# Altium PCB PCB1.PcbDoc
Units mil, origin at the board's own origin, x right, y up, seen from the top; angles counter-clockwise.
Board outline 3735.03 x 3790.03 mil, 2 copper layers (Top Layer, Bottom Layer); 89 components, 44 nets, 182 pads, 380 vias.
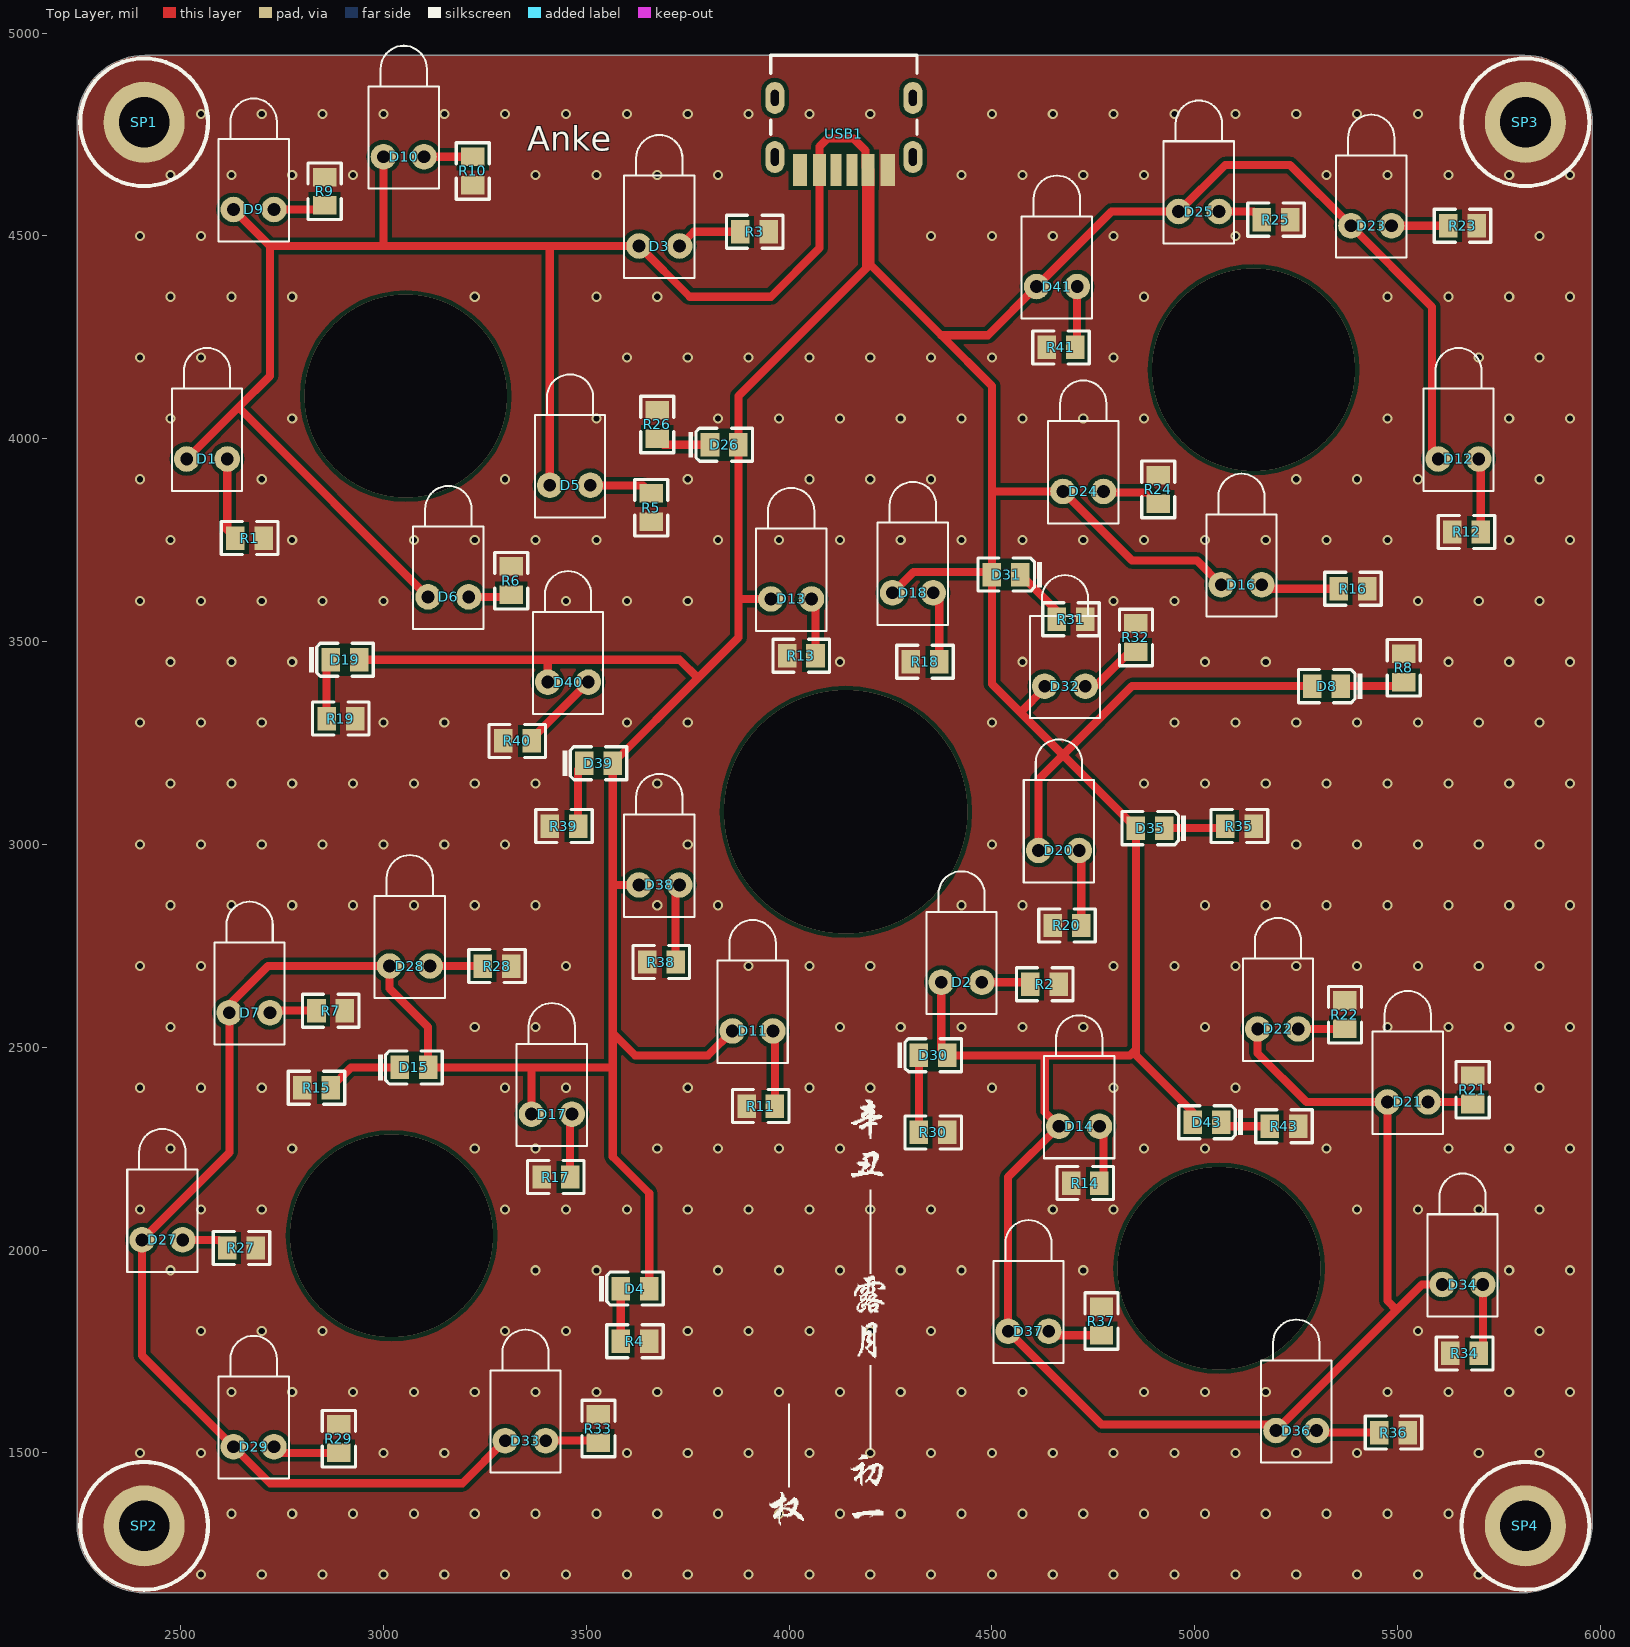
[diagram p0: Top Layer view]
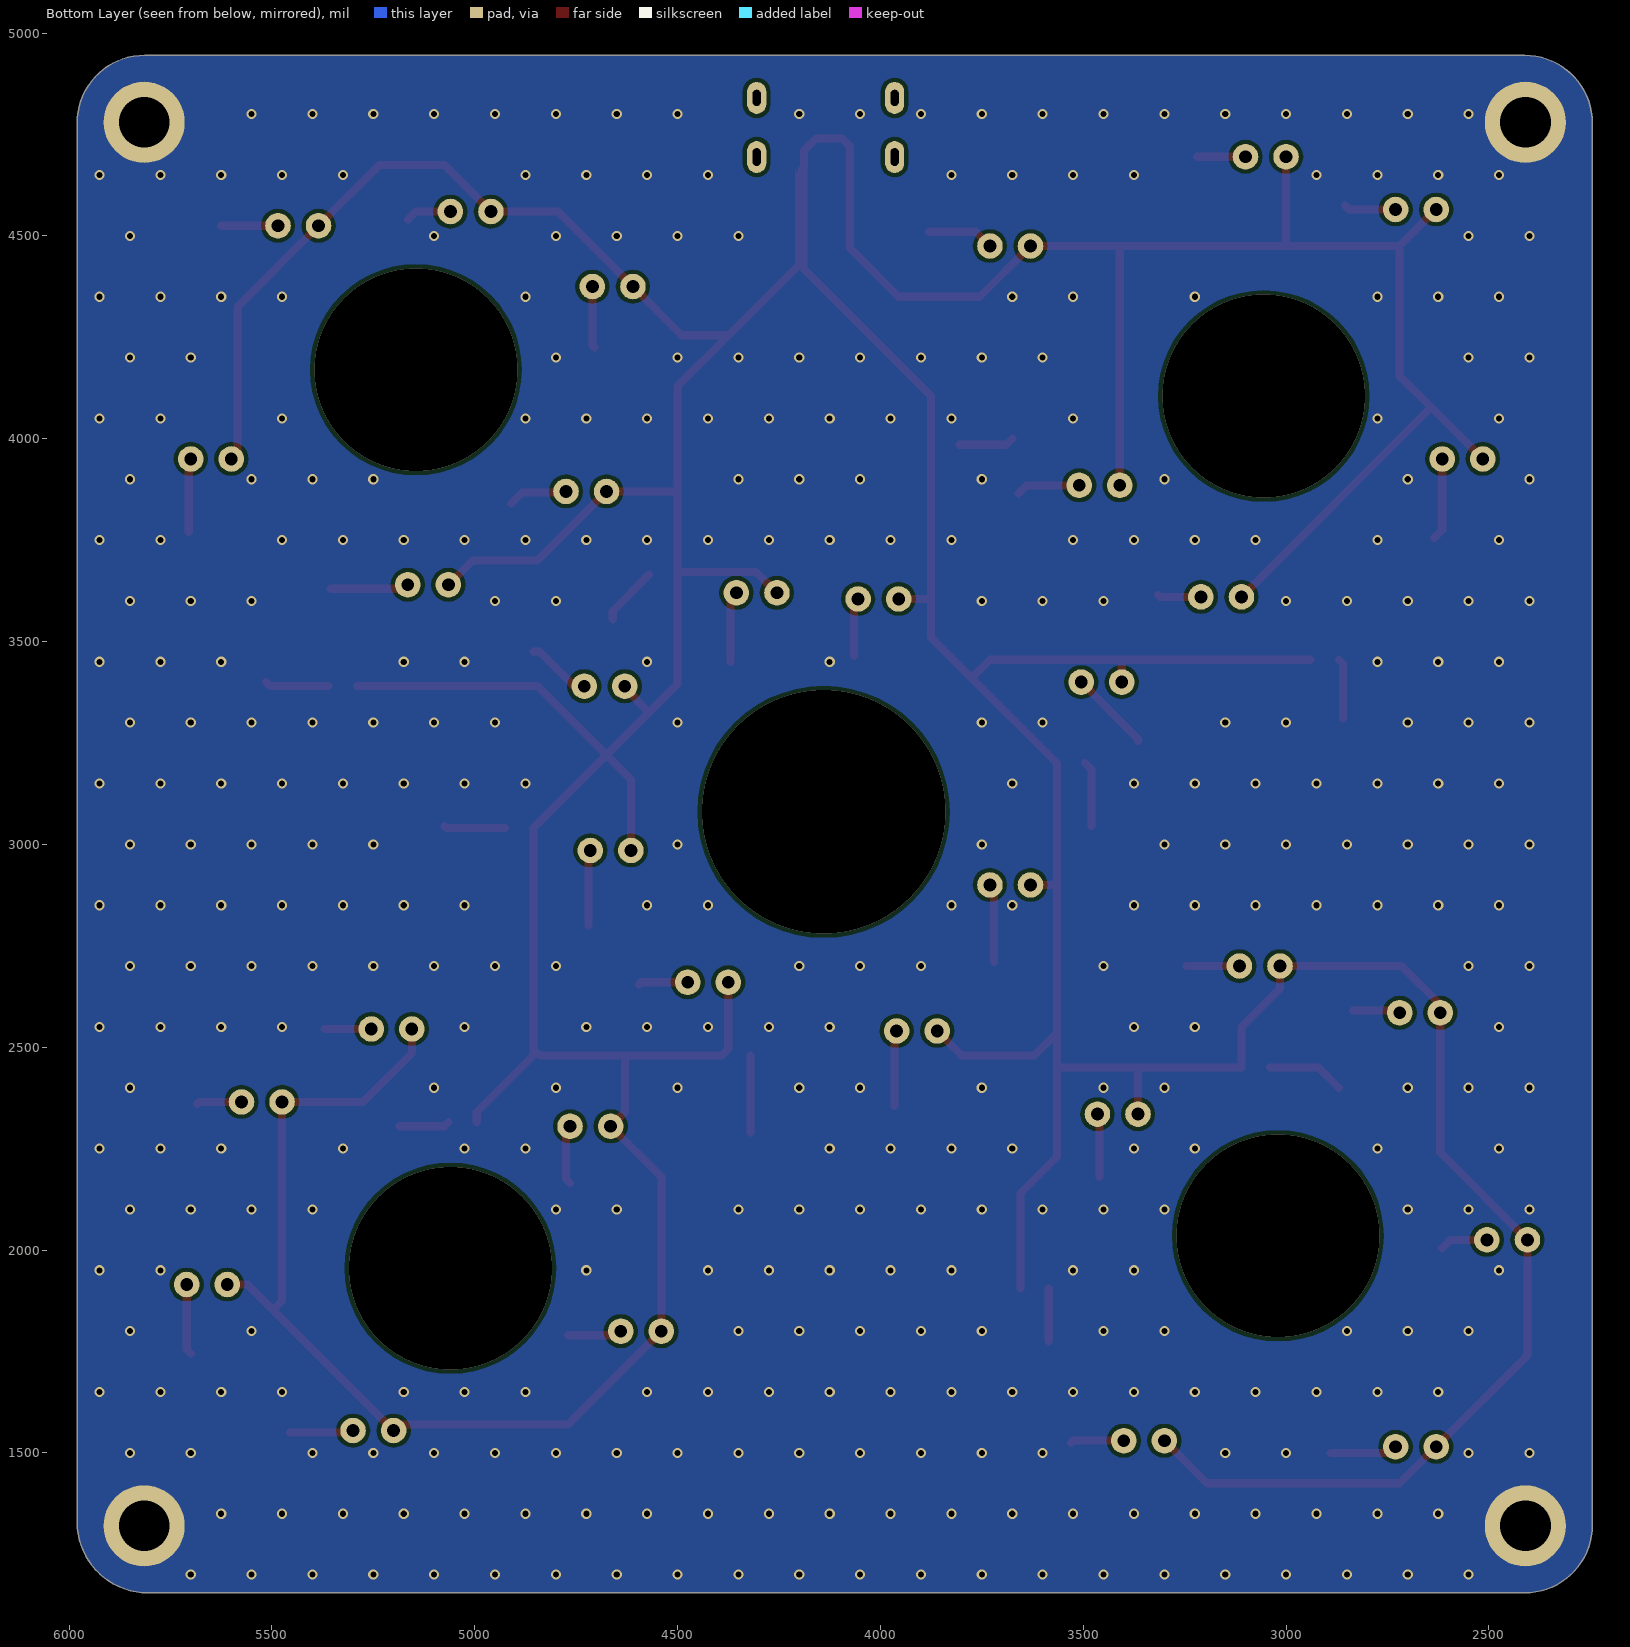
[diagram p1: Bottom Layer view, seen from below]
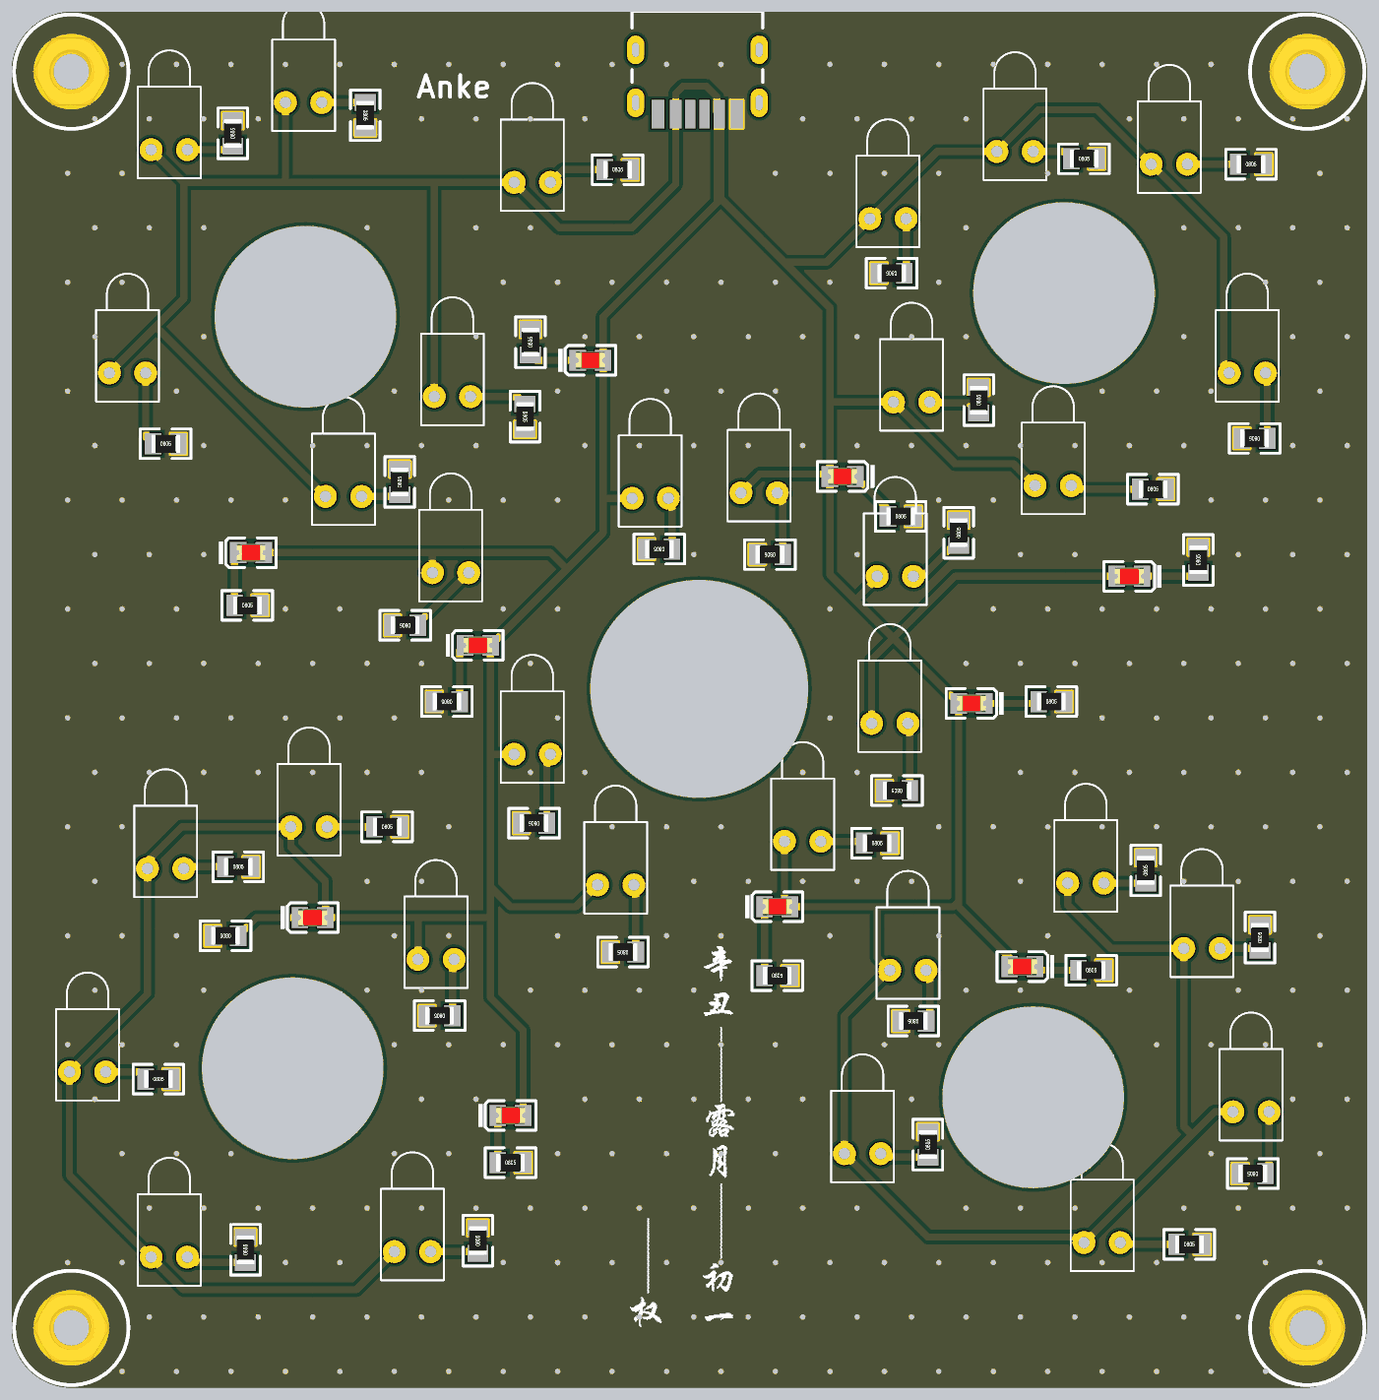
[diagram p2: 3D render of the assembled board from above, using the file's embedded part models]

## Layer stack, top to bottom
Top Solder: solder mask 0.4, Solder Resist, Dk 3.5
Top Layer: signal copper 1.4
Dielectric 1: dielectric 12.6, FR-4, Dk 4.8
Bottom Layer: signal copper 1.4
Bottom Solder: solder mask 0.4, Solder Resist, Dk 3.5

## Board outline
2244.99,1322.08 2244.99,4777.92 cw(c2412.08,4777.92) 2412.08,4945.02 5813.67,4945.02 cw(c5813.67,4778.67) 5980.02,4778.67 5980.02,1329.28 cw(c5805.72,1329.28) 5805.72,1154.98 2412.08,1154.98 cw(c2412.08,1322.08)

## Design rules (kind name [scope] priority, off if disabled: settings)
Clearance [All] p1: gap=10 ignorepadtopadclearanceinfootprint=FALSE except(0: Arc-Hole Track-Hole SMDPad-Hole THPad-Hole Via-Hole Fill-Hole Poly-Hole Region-Hole Text-Hole)
PolygonConnect [All] p1: connectstyle=Direct reliefconductorwidth=10 reliefentries=4 polygonreliefangle="90 Angle" airgapwidth=10
RoutingVias [All] p1: holewidth=28 width=50 viastyle="Through Hole" minholewidth=28 minwidth=50 maxholewidth=28 maxwidth=50
SolderMaskExpansion [All] p1: expansion=4
Width [All] p1: maxlimit=20 minlimit=10 preferedwidth=20 toplayer_minwidth=20 bottomlayer_maxwidth=10 bottomlayer_prefwidth=10 minimp=50.000000 maximp=50.000000 favimp=50.000000
30 further rules are at their usual default settings.

## Components (designator, comment, footprint, x,y, rotation, side; value= is the part's Value field where it differs from the comment)
D1 "LED1" LED-1 2565,3950 r90 top
D2 "LED1" LED-1 4425,2660 r90 top
D3 "LED1" LED-1 3680,4475 r90 top
D4 "黄灯 0805" 0805_LED_S1 3620.04,1905 r0 top
D5 "LED1" LED-1 3460,3885 r90 top
D6 "LED1" LED-1 3160,3610 r90 top
D7 "LED1" LED-1 2670,2585 r90 top
D8 "黄灯 0805" 0805_LED_S1 5325,3390 r180 top
D9 "LED1" LED-1 2680,4565 r90 top
D10 "LED1" LED-1 3050,4695 r90 top
D11 "LED1" LED-1 3910,2540 r90 top
D12 "LED1" LED-1 5650,3950 r90 top
D13 "LED1" LED-1 4005,3605 r90 top
D14 "LED1" LED-1 4715,2305 r90 top
D15 "黄灯 0805" 0805_LED_S1 3075,2450 r0 top
D16 "LED1" LED-1 5115,3640 r90 top
D17 "LED1" LED-1 3415,2335 r90 top
D18 "LED1" LED-1 4305,3620 r90 top
D19 "黄灯 0805" 0805_LED_S1 2905,3455 r0 top
D20 "LED1" LED-1 4665,2985 r90 top
D21 "LED1" LED-1 5525,2365 r90 top
D22 "LED1" LED-1 5205,2545 r90 top
D23 "LED1" LED-1 5435,4525 r90 top
D24 "LED1" LED-1 4725,3870 r90 top
D25 "LED1" LED-1 5010,4560 r90 top
D26 "黄灯 0805" 0805_LED_S1 3840,3985 r0 top
D27 "LED1" LED-1 2455,2025 r90 top
D28 "LED1" LED-1 3065,2700 r90 top
D29 "LED1" LED-1 2680,1515 r90 top
D30 "黄灯 0805" 0805_LED_S1 4355.04,2480 r0 top
D31 "黄灯 0805" 0805_LED_S1 4534.96,3665 r180 top
D32 "LED1" LED-1 4680,3390 r90 top
D33 "LED1" LED-1 3350,1530 r90 top
D34 "LED1" LED-1 5660,1915 r90 top
D35 "黄灯 0805" 0805_LED_S1 4890,3040 r180 top
D36 "LED1" LED-1 5250,1555 r90 top
D37 "LED1" LED-1 4590,1800 r90 top
D38 "LED1" LED-1 3680,2900 r90 top
D39 "黄灯 0805" 0805_LED_S1 3530.04,3200 r0 top
D40 "LED1" LED-1 3455,3400 r90 top
D41 "LED1" LED-1 4660,4375 r90 top
D43 "黄灯 0805" 0805_LED_S1 5030,2315 r180 top
R1 "2Ω (2R00) ±1%" 0805_R 2670,3755 r0 top
R2 "2Ω (2R00) ±1%" 0805_R 4630,2655 r0 top
R3 "2Ω (2R00) ±1%" 0805_R 3915.04,4510 r0 top
R4 "2Ω (2R00) ±1%" 0805_R 3620.04,1775 r0 top
R5 "2Ω (2R00) ±1%" 0805_R 3660,3829.96 r270 top
R6 "2Ω (2R00) ±1%" 0805_R 3315,3649.96 r90 top
R7 "2Ω (2R00) ±1%" 0805_R 2869.96,2590 r0 top
R8 "2Ω (2R00) ±1%" 0805_R 5515,3435.04 r90 top
R9 "2Ω (2R00) ±1%" 0805_R 2855,4609.96 r90 top
R10 "2Ω (2R00) ±1%" 0805_R 3220,4660 r270 top
R11 "2Ω (2R00) ±1%" 0805_R 3930.04,2355 r180 top
R12 "2Ω (2R00) ±1%" 0805_R 5669.96,3770 r180 top
R13 "2Ω (2R00) ±1%" 0805_R 4030,3465 r180 top
R14 "2Ω (2R00) ±1%" 0805_R 4730,2165 r180 top
R15 "2Ω (2R00) ±1%" 0805_R 2835,2400 r180 top
R16 "2Ω (2R00) ±1%" 0805_R 5390.04,3630 r0 top
R17 "2Ω (2R00) ±1%" 0805_R 3424.96,2180 r180 top
R18 "2Ω (2R00) ±1%" 0805_R 4334.96,3450 r180 top
R19 "2Ω (2R00) ±1%" 0805_R 2894.96,3310 r0 top
R20 "2Ω (2R00) ±1%" 0805_R 4684.96,2800 r180 top
R21 "2Ω (2R00) ±1%" 0805_R 5685,2395 r90 top
R22 "2Ω (2R00) ±1%" 0805_R 5370,2580.04 r90 top
R23 "2Ω (2R00) ±1%" 0805_R 5660.04,4525 r0 top
R24 "2Ω (2R00) ±1%" 0805_R 4910,3875.04 r90 top
R25 "2Ω (2R00) ±1%" 0805_R 5200,4540 r0 top
R26 "2Ω (2R00) ±1%" 0805_R 3675,4035 r90 top
R27 "2Ω (2R00) ±1%" 0805_R 2650.04,2005 r0 top
R28 "2Ω (2R00) ±1%" 0805_R 3280.04,2700 r0 top
R29 "2Ω (2R00) ±1%" 0805_R 2890,1535 r90 top
R30 "2Ω (2R00) ±1%" 0805_R 4354.96,2290 r0 top
R31 "2Ω (2R00) ±1%" 0805_R 4694.96,3555 r0 top
R32 "2Ω (2R00) ±1%" 0805_R 4855,3510 r90 top
R33 "2Ω (2R00) ±1%" 0805_R 3530,1559.96 r90 top
R34 "2Ω (2R00) ±1%" 0805_R 5665.04,1745 r180 top
R35 "2Ω (2R00) ±1%" 0805_R 5110,3045 r0 top
R36 "2Ω (2R00) ±1%" 0805_R 5490,1550 r0 top
R37 "2Ω (2R00) ±1%" 0805_R 4770,1825 r90 top
R38 "2Ω (2R00) ±1%" 0805_R 3685,2710 r180 top
R39 "2Ω (2R00) ±1%" 0805_R 3444.96,3045 r180 top
R40 "2Ω (2R00) ±1%" 0805_R 3330,3255 r180 top
R41 "2Ω (2R00) ±1%" 0805_R 4670,4225 r180 top
R43 "2Ω (2R00) ±1%" 0805_R 5219.96,2305 r0 top
SP1 "M3铜柱" M3x4_L 2410,4780 r0 top
SP2 "M3铜柱" M3x4_L 2410,1320 r0 top
SP3 "M3铜柱" M3x4_L 5815,4780 r0 top
SP4 "M3铜柱" M3x4_L 5815,1320 r0 top
USB1 "USB-C" USB-C/S_C 4134.92,4940.4 r180 top

## Footprints (in the part's own frame and the unit in brackets; to place one, negate y for a bottom-side part, rotate by r counter-clockwise, add the part's x,y. Pads: shape width x height; smd on the part's side, far side on the other; paste and mask are expansions set on the pad)
0805_LED_S1 [mm]
  rect 1.16x1.47 smd: A(0.89,0) K(-0.89,0)
  silkscreen extent -2.24,-1.04 1.77,1.03, body extent -1.01,-0.62 1.01,0.62, height 1.1
0805_R [mm]
  rect 1.16x1.47 smd: 1(-0.89,0) 2(0.89,0)
  silkscreen extent -1.77,-1.04 1.77,1.03, body extent -1,-0.62 1,0.63, height 0.49
LED-1 [mm] "LED; 2 Leads"
  round 1.6 hole 0.8: 1(0,1.27) 2(0,-1.27)
  silkscreen extent -2,-2.2 6.95,2.2
M3x4_L [mil] "M3铜柱，长：4mm"
  round 200 hole 125: 1(0,0)
  silkscreen extent -157,-157 157,157, body extent -106,-93 106,93, height 159
USB-C/S_C [mm] "Type-C 6P母座"
  oval 1.2x2 hole 0.5 slot 1.1 at 90 deg: 0(-4.32,6.25) 0(4.32,6.25)
  oval 1.2x2 hole 0.5 slot 1 at 90 deg: 0(-4.32,2.55) 0(4.32,2.55)
  rect 0.7x2 smd: A5(-0.5,7.05) B5(0.5,7.05)
  rect 0.8x2 smd: A9(1.52,7.05) B9(-1.52,7.05)
  rect 0.9x2 smd: A12(2.75,7.05) B12(-2.75,7.05)
  silkscreen extent -4.57,-0.13 4.57,4.83, body extent -4.47,0 4.48,7.05, height 3.16

## Part data
D1 D2 D3 D5 D6 D7 D9 D10 D11 D12 D13 D14 D16 D17 D18 D20 D21 D22 D23 D24 D25 D27 D28 D29 D32 D33 D34 D36 D37 D38 D40 D41: "Typical RED GaAs LED", LatestRevisionDate=08-Jul-2005, LatestRevisionNote="Mech Layer 1 removed.", PackageDescription="LED; 2 Leads", PackageReference=LED-1, Published=8-Jun-2000, Publisher="Altium Limited"
D4 D8 D15 D19 D26 D30 D31 D35 D39 D43: library part "0805 黄灯", "发光二极管", Package=0805, SuppliersPartNumber=C2296, ComponentLink1Description=供应, ComponentLink1URL=http://www.szlcsc.com/product/details_2669.html, Supplier=LC
R1 R2 R3 R4 R5 R6 R7 R8 R9 R10 R11 R12 R13 R14 R15 R16 R17 R18 R19 R20 R21 R22 R23 R24 R25 R26 R27 R28 R29 R30 R31 R32 R33 R34 R35 R36 R37 R38 R39 R40 R41 R43: library part "0805 2Ω (2R00) 1%", "贴片电阻", Package=0805, SuppliersPartNumber=C17606, ComponentLink1Description=供应, ComponentLink1URL=http://www.szlcsc.com/product/details_18294.html, Supplier=LC
SP1 SP2 SP3 SP4: library part 铜柱小焊盘, "铜柱"
USB1: library part USB-C_6P/S, "USB-C_6P型母接口", BOM名称=USB-CÐ

## Via types
v1: diameter 25, hole 15, Top Layer to Bottom Layer, tented both sides, 375 vias
v2: diameter 500, hole 500, Top Layer to Bottom Layer, tented both sides, 4 vias
v3: diameter 600, hole 600, Top Layer to Bottom Layer, tented both sides, 1 vias

## Nets (pads, with @x,y where several pads share a name; then routed paths per layer and width w, separated by ;. In a path a pad name is that pad's centre, name@x,y a point inside that pad or via, vN(x,y) a via of type N, cw(c..) or ccw(c..) an arc to the next point about the centre after c; other vN are vias at no path point)
B9: D1.1 D2.1 D3.1 D4.A D5.1 D6.1 D7.1 D8.A D9.1 D10.1 D11.1 D12.1 D13.1 D14.1 D15.A D16.1 D17.1 D18.1 D19.A D20.1 D21.1 D22.1 D23.1 D24.1 D25.1 D26.A D27.1 D28.1 D29.1 D30.A D31.A D32.1 D33.1 D34.1 D35.A D36.1 D37.1 D38.1 D39.A D40.1 D41.1 D43.A USB1.A9 USB1.B9 | length 21877.2
  Top Layer w20: D1.1 2642.5,4077.5 ; D9.1 2720,4475 ; D19.A 3400,3455 ; D10.1 3000,4480 3005,4475 ; D6.1 2642.5,4077.5 ; D33.1 3195,1425 2720,1425 D29.1 2405,1740 D27.1 2620,2240 D7.1 2620,2605 2715,2700 D28.1 3015,2645 3110.04,2549.96 D15.A 3370,2450 ; D17.1 3365,2445 3370,2450 ; D40.1 3405,3450 3400,3455 ; D5.1 3410,4475 ; D38.1 3570.08,2900 3565.08,2905 ; D4.A 3655.08,2139.92 3565.08,2229.92 3565.08,2445 ; D11.1 3800,2480 3620.08,2480 3565.08,2535 ; D13.1 3875.04,3605 ; D18.1 4306.5,3671.5 4493.43,3671.5 D31.A ; D2.1 4375,2495.08 D30.A 4630,2480 ; D20.1 4615,3160.04 4674.96,3220 ; D32.1@4630,3385 4569.98,3324.98 ; D43.A 4994.96,2340.04 4854.96,2480.04 4854.96,2495 ; D16.1 5005,3700 4845,3700 D24.1 4504.92,3870 4499.92,3865 ; D22.1 5155,2485 5275,2365 D21.1 5475,1875 5497.5,1852.5 ; D8.A 4844.96,3390 4674.96,3220 ; D12.1 5585,3965 5585,4325 D23.1 5235,4675 5075,4675 D25.1 4795,4560 D41.1 4489.88,4254.88 4374.88,4254.88 ; D34.1 5560,1915 5497.5,1852.5 ; 2642.5,4077.5 2720,4155 2720,4475 ; 2720,4475 3005,4475 ; 3005,4475 3410,4475 ; 3370,2450 3560.08,2450 3565.08,2445 ; 3400,3455 3730.08,3455 3775.08,3410 ; 3410,4475 D3.1 3755,4350 3955,4350 4075.08,4470.08 USB1.A9 4075.08,4720.08 4095,4740 4158.87,4740 4188.39,4710.49 4188.39,4669.21 USB1.B9 4194.76,4435 ; 3565.08,2445 3565.08,2535 ; 3565.08,2535 3565.08,2905 ; 3565.08,2905 D39.A 3775.08,3410 ; 3775.08,3410 3875.04,3509.96 3875.04,3605 ; 3875.04,3605 D26.A 3875.04,4105.04 4194.76,4424.76 4194.76,4435 ; 4194.76,4435 4374.88,4254.88 ; 4374.88,4254.88 4499.92,4129.84 4499.92,3865 ; D31.A 4499.92,3865 ; D31.A 4499.92,3395.04 4569.98,3324.98 ; 4569.98,3324.98 4674.96,3220 ; 4630,2480 4630,2340 D14.1 4540,2180 D37.1 4770,1570 5185,1570 D36.1 5497.5,1852.5 ; 4630,2480 4839.96,2480 4854.96,2495 ; 4674.96,3220 D35.A 4854.96,2495
GND: R1.2 R2.2 R3.2 R4.2 R5.2 R6.2 R7.2 R8.2 R9.2 R10.2 R11.2 R12.2 R13.2 R14.2 R15.2 R16.2 R17.2 R18.2 R19.2 R20.2 R21.2 R22.2 R23.2 R24.2 R25.2 R26.2 R27.2 R28.2 R29.2 R30.2 R31.2 R32.2 R33.2 R34.2 R35.2 R36.2 R37.2 R38.2 R39.2 R40.2 R41.2 R43.2 SP1.1 SP2.1 SP3.1 SP4.1 USB1.B12
  other v1: 2550,1200 2700,1200 2850,1200 3000,1200 3150,1200 3300,1200 3450,1200 3600,1200 3750,1200 3900,1200 4050,1200 4200,1200 4350,1200 4500,1200 4650,1200 4800,1200 4950,1200 5100,1200 5250,1200 5400,1200 5550,1200 5700,1200 2625,1350 2775,1350 2925,1350 3075,1350 3225,1350 3375,1350 3525,1350 3675,1350 3825,1350 3975,1350 4125,1350 4275,1350 4425,1350 4575,1350 4725,1350 4875,1350 5025,1350 5175,1350 5325,1350 5475,1350 5625,1350 2400,1500 2550,1500 3000,1500 3150,1500 3600,1500 3750,1500 3900,1500 4050,1500 4200,1500 4350,1500 4500,1500 4650,1500 4800,1500 4950,1500 5100,1500 5250,1500 5400,1500 5700,1500 5850,1500 2625,1650 2775,1650 2925,1650 3075,1650 3225,1650 3375,1650 3525,1650 3675,1650 3825,1650 3975,1650 4125,1650 4275,1650 4425,1650 4575,1650 4875,1650 5025,1650 5175,1650 5475,1650 5625,1650 5775,1650 5925,1650 2550,1800 2700,1800 2850,1800 3300,1800 3450,1800 3750,1800 3900,1800 4050,1800 4200,1800 4350,1800 5550,1800 5850,1800 2475,1950 3375,1950 3525,1950 3825,1950 3975,1950 4125,1950 4275,1950 4425,1950 4725,1950 5775,1950 5925,1950 2400,2100 2550,2100 2700,2100 3300,2100 3450,2100 3600,2100 3750,2100 3900,2100 4050,2100 4200,2100 4350,2100 4650,2100 4800,2100 5400,2100 5550,2100 5700,2100 5850,2100 2475,2250 2775,2250 3225,2250 3375,2250 3675,2250 3825,2250 3975,2250 4125,2250 4875,2250 5025,2250 5325,2250 5625,2250 5775,2250 5925,2250 2400,2400 2550,2400 2700,2400 3300,2400 3450,2400 3750,2400 4050,2400 4200,2400 4500,2400 4800,2400 5100,2400 5850,2400 2475,2550 3225,2550 3375,2550 4125,2550 4275,2550 4425,2550 4575,2550 4725,2550 5025,2550 5475,2550 5625,2550 5775,2550 5925,2550 2400,2700 2550,2700 3450,2700 3900,2700 4050,2700 4200,2700 4800,2700 4950,2700 5100,2700 5250,2700 5400,2700 5550,2700 5700,2700 5850,2700 2475,2850 2625,2850 2775,2850 2925,2850 3075,2850 3225,2850 3375,2850 3675,2850 3825,2850 4425,2850 4575,2850 5025,2850 5175,2850 5325,2850 5475,2850 5625,2850 5775,2850 5925,2850 2400,3000 2550,3000 2700,3000 2850,3000 3000,3000 3150,3000 3300,3000 3750,3000 4500,3000 5250,3000 5400,3000 5550,3000 5700,3000 5850,3000 2475,3150 2625,3150 2775,3150 2925,3150 3075,3150 3225,3150 3375,3150 3675,3150 4875,3150 5025,3150 5175,3150 5325,3150 5475,3150 5625,3150 5775,3150 5925,3150 2400,3300 2550,3300 2700,3300 3000,3300 3150,3300 3600,3300 3750,3300 4500,3300 4950,3300 5100,3300 5250,3300 5400,3300 5550,3300 5700,3300 5850,3300 2475,3450 2625,3450 2775,3450 4125,3450 4575,3450 5025,3450 5175,3450 5625,3450 5775,3450 5925,3450 2400,3600 2550,3600 2700,3600 2850,3600 3000,3600 3450,3600 3600,3600 3750,3600 4800,3600 4950,3600 5550,3600 5700,3600 5850,3600 2475,3750 2775,3750 3075,3750 3225,3750 3375,3750 3525,3750 3825,3750 3975,3750 4125,3750 4275,3750 4425,3750 4575,3750 4725,3750 4875,3750 5025,3750 5175,3750 5325,3750 5475,3750 5775,3750 5925,3750 2400,3900 2700,3900 3300,3900 3750,3900 4050,3900 4200,3900 4350,3900 5250,3900 5400,3900 5550,3900 5850,3900 2475,4050 2775,4050 3525,4050 3825,4050 3975,4050 4125,4050 4275,4050 4425,4050 4575,4050 4725,4050 4875,4050 5475,4050 5775,4050 5925,4050 2400,4200 2550,4200 3600,4200 3750,4200 3900,4200 4050,4200 4200,4200 4350,4200 4500,4200 4800,4200 5700,4200 5850,4200 2475,4350 2625,4350 2775,4350 3225,4350 3525,4350 3675,4350 4875,4350 5475,4350 5625,4350 5775,4350 5925,4350 2400,4500 2550,4500 4350,4500 4500,4500 4650,4500 4800,4500 5100,4500 5850,4500 2475,4650 2625,4650 2775,4650 2925,4650 3375,4650 3525,4650 3675,4650 3825,4650 4425,4650 4575,4650 4725,4650 4875,4650 5325,4650 5475,4650 5625,4650 5775,4650 5925,4650 2550,4800 2700,4800 2850,4800 3000,4800 3150,4800 3300,4800 3450,4800 3600,4800 3750,4800 3900,4800 4050,4800 4200,4800 4500,4800 4650,4800 4800,4800 4950,4800 5100,4800 5250,4800 5400,4800 5550,4800
NetD1_2: D1.2 R1.1 | length 203.3
  Top Layer w20: D1.2 2615,3774.96 R1.1
NetD2_2: D2.2 R2.1 | length 122
  Top Layer w20: D2.2 4589.96,2660 R2.1
NetD3_2: D3.2 R3.1 | length 164.5
  Top Layer w20: D3.2 3765,4510 R3.1
NetD4_K: D4.K R4.1 | length 130
  Top Layer w20: R4.1 D4.K
NetD5_2: D5.2 R5.1 | length 158.3
  Top Layer w20: D5.2 3640,3885 R5.1
NetD6_2: D6.2 R6.1 | length 107
  Top Layer w20: D6.2 3310.08,3610 R6.1
NetD7_2: D7.2 R7.1 | length 117
  Top Layer w20: D7.2 2725,2590 R7.1
NetD8_K: D8.K R8.1 | length 159.1
  Top Layer w20: D8.K 5505,3390 R8.1
NetD9_2: D9.2 R9.1 | length 129.1
  Top Layer w20: D9.2 2845.08,4565 R9.1
NetD10_2: D10.2 R10.1 | length 120
  Top Layer w20: D10.2 D10.2 R10.1
NetD11_2: D11.2 R11.1 | length 187.1
  Top Layer w20: D11.2 3965.08,2534.92 R11.1
NetD12_2: D12.2 R12.1 | length 182.1
  Top Layer w20: D12.2 5705,3945 R12.1
NetD13_2: D13.2 R13.1 | length 144.2
  Top Layer w20: D13.2 4065.04,3594.96 R13.1
NetD14_2: D14.2 R14.1 | length 148.3
  Top Layer w20: D14.2 4775,2295 4775,2174.96 R14.1
NetD15_K: D15.K R15.1 | length 190.6
  Top Layer w20: R15.1 2920.04,2450 D15.K
NetD16_2: D16.2 R16.1 | length 194.1
  Top Layer w20: D16.2 5175,3630 R16.1
NetD17_2: D17.2 R17.1 | length 157.1
  Top Layer w20: R17.1 3460,2330 D17.2
NetD18_2: D18.2 R18.1 | length 176.2
  Top Layer w20: D18.2 4370,3605 R18.1
NetD19_K: D19.K R19.1 | length 149.2
  Top Layer w20: R19.1 2859.92,3444.96 D19.K
NetD20_2: D20.2 R20.1 | length 187.1
  Top Layer w20: D20.2 4720,2980 R20.1
NetD21_2: D21.2 R21.1 | length 112.1
  Top Layer w20: D21.2 5679.96,2365 R21.1
NetD22_2: D22.2 R22.1 | length 115
  Top Layer w20: D22.2 R22.1
NetD23_2: D23.2 R23.1 | length 140
  Top Layer w20: D23.2 R23.1
NetD24_2: D24.2 R24.1 | length 149
  Top Layer w20: D24.2 4775,3867.24 4882.76,3867.24 R24.1
NetD25_2: D25.2 R25.1 | length 113.2
  Top Layer w20: D25.2 5144.96,4560 R25.1
NetD26_K: D26.K R26.1 | length 136.2
  Top Layer w20: R26.1 3689.96,3985 D26.K
NetD27_2: D27.2 R27.1 | length 118.3
  Top Layer w20: D27.2 2595,2025 R27.1
NetD28_2: D28.2 R28.1 | length 130
  Top Layer w20: D28.2 R28.1
NetD29_2: D29.2 R29.1 | length 166.2
  Top Layer w20: D29.2 2745.04,1499.96 R29.1
NetD30_K: D30.K R30.1 | length 190
  Top Layer w20: R30.1 4319.92,2479.92 D30.K
NetD31_K: D31.K R31.1 | length 147.2
  Top Layer w20: D31.K 4659.92,3575.08 R31.1
NetD32_2: D32.2 R32.1 | length 160.2
  Top Layer w20: D32.2 4755,3390 4839.96,3474.96 R32.1
NetD33_2: D33.2 R33.1 | length 132.1
  Top Layer w20: D33.2 3524.92,1530 R33.1
NetD34_2: D34.2 R34.1 | length 174.1
  Top Layer w20: R34.1 5710,1754.92 D34.2
NetD35_K: D35.K R35.1 | length 152
  Top Layer w20: D35.K 5069.96,3040 R35.1
NetD36_2: D36.2 R36.1 | length 157
  Top Layer w20: D36.2 5305,1550 R36.1
NetD37_2: D37.2 R37.1 | length 134.2
  Top Layer w20: D37.2 4650.04,1789.96 R37.1
NetD38_2: D38.2 R38.1 | length 194.1
  Top Layer w20: R38.1 3720.04,2890.04 D38.2
NetD39_K: D39.K R39.1 | length 161.2
  Top Layer w20: R39.1 3480,3185 D39.K
NetD40_2: D40.2 R40.1 | length 203
  Top Layer w20: R40.1 3365.04,3260.04 D40.2
NetD41_2: D41.2 R41.1 | length 152.1
  Top Layer w20: R41.1 4710,4229.96 D41.2
NetD43_K: D43.K R43.1 | length 124
  Top Layer w20: D43.K 5075.04,2305 R43.1
pads on no net: USB1.0 USB1.A5 USB1.A12 USB1.B5
copper on no net:
  other v2: 5060,1955 3020,2035 3055,4105 5145,4170
  other v3: 4140,3080

## Polygon pours and split planes (outlines as drawn)
GND on Bottom Layer "Top Layer-No Net1" (solid, pour order 3): 2244.99,1322.08 2244.99,4777.92 cw(c2412.08,4777.92) 2412.08,4945.02 5813.67,4945.02 cw(c5813.67,4778.67) 5980.02,4778.67 5980.02,1329.28 cw(c5805.72,1329.28) 5805.72,1154.98 2412.08,1154.98 cw(c2412.08,1322.08)
GND on Top Layer "Top Layer-No Net" (solid, pour order 4): 2244.99,1322.08 2244.99,4777.92 cw(c2412.08,4777.92) 2412.08,4945.02 5813.67,4945.02 cw(c5813.67,4778.67) 5980.02,4778.67 5980.02,1329.28 cw(c5805.72,1329.28) 5805.72,1154.98 2412.08,1154.98 cw(c2412.08,1322.08)

## Other copper
Top Layer:
  region net B9: 4210,4665 4210,4430 4200,4430 4194.76,4424.76 4194.76,4585.24 4185,4595
  region net B9: 4180,4665 4180,4410 4194.76,4424.76 4194.76,4619.76 4200,4625

## Silkscreen, mask and mechanical layers (free items; w line width, h text height)
Top Overlay:
  drawing of 806 lines, arcs and shapes, not listed
  text "Anke" at 3355,4710 h60
Mechanical 1:
  lines w10: 3060,1160 5805.72,1160 ccw(c5805.72,1329.28) 5975,1329.28 5975,4778.67 ccw(c5813.67,4778.67) 5813.67,4940 2485,4940 2412.08,4940 ccw(c2412.08,4777.92) 2250,4777.92 2250,4485 2250,1322.08 ccw(c2412.08,1322.08) 2412.08,1160 3080,1160